# EAGLE board mulemachinePCB_withLEDs (EAGLE 9.6.2)
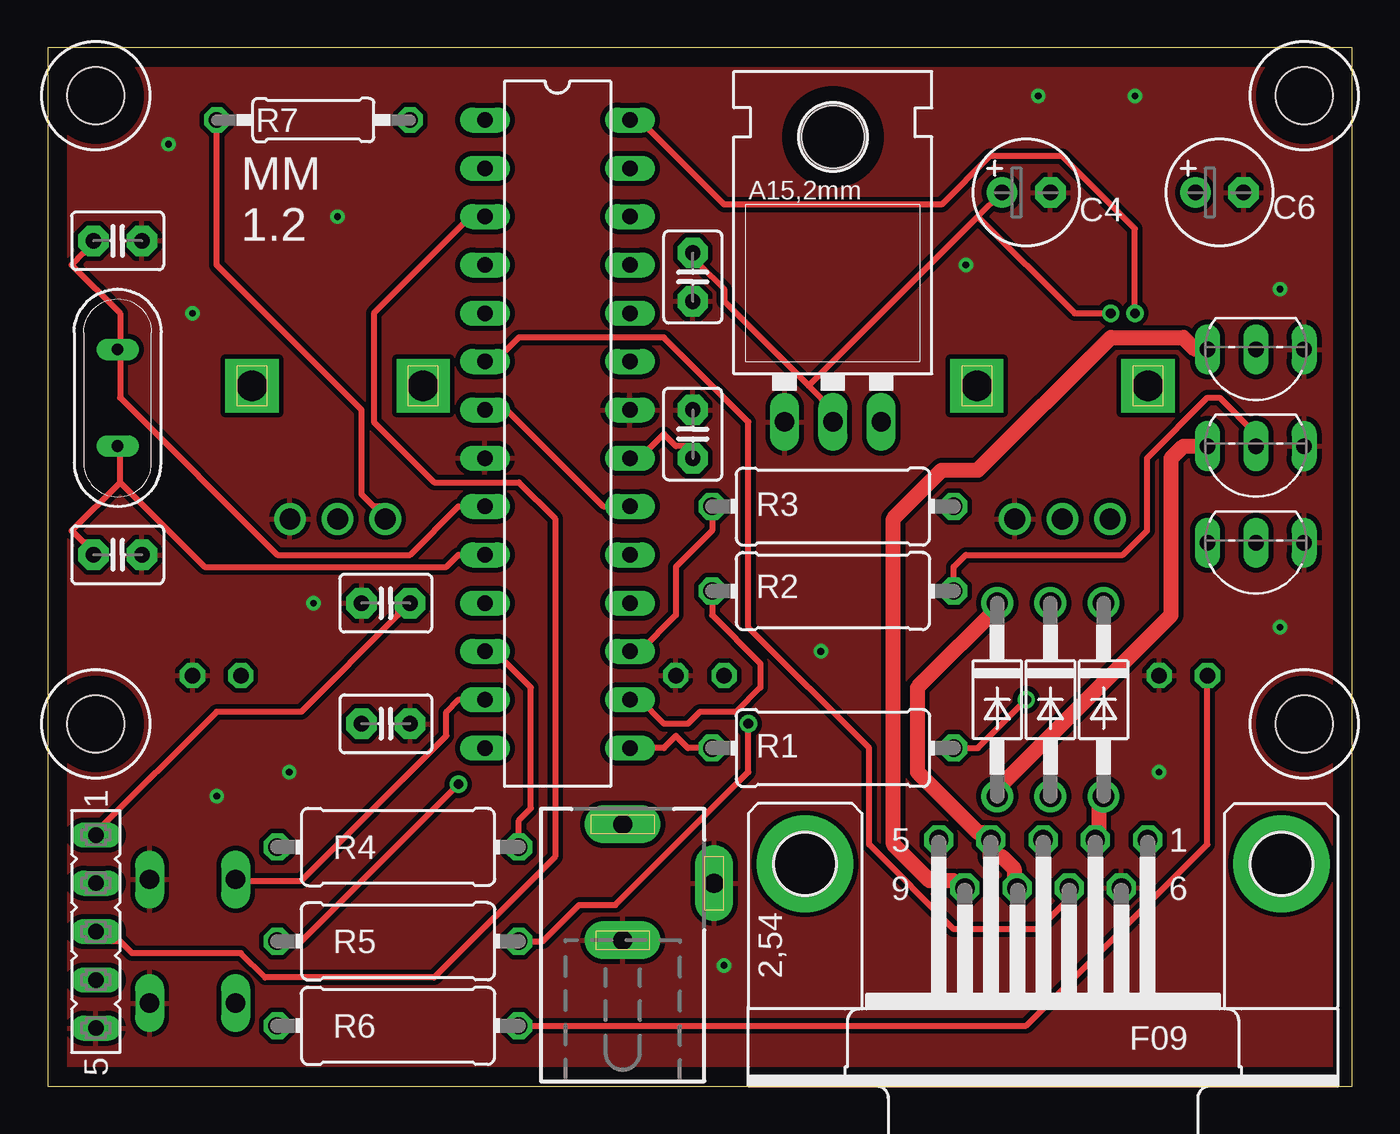
[diagram p0: board, top side]
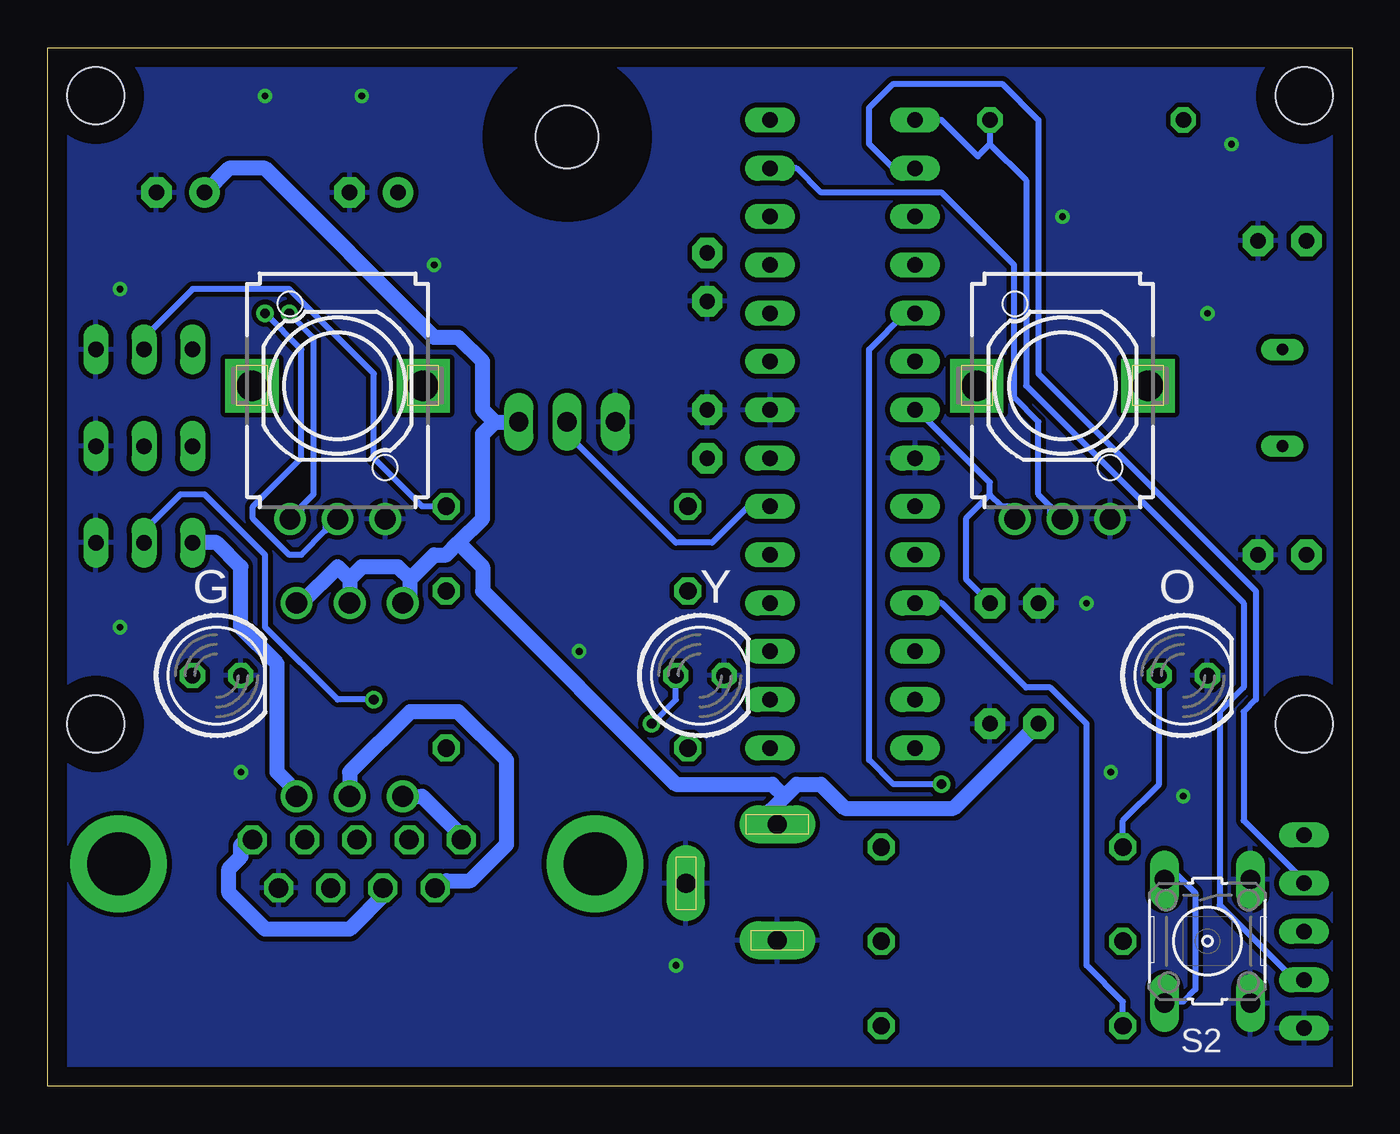
[diagram p1: board, bottom side, seen from below]

Size 68.58 x 54.61 mm. Coordinates in mm from the lower left corner, seen from the top.
Outline: 0,0 68.58,0 68.58,54.61 0,54.61 0,0
Copper layers (1*16): Top 0.035mm / dielectric 1.5mm / Bottom 0.035mm
Design rules "default": minimum track width 6mil, minimum drill 0.35mm, track to track 6mil, track to pad 6mil, pad to pad 6mil, via to via 6mil, smd to smd 6mil, copper to edge 40mil, drill to drill 6mil, minimum pad ring 10mil, minimum via ring 8mil, stop-mask expansion 4mil, vias tented up to drill 0mil, thermal gap 10mil
Net classes: 0 default: width 0.305 mm, drill 0.508 mm, clearance 0.254 mm; 1 Power: width 0.787 mm, drill 0.508 mm, clearance 0.254 mm
Holes 3 mm at 2.54,52.07 2.54,19.05 66.04,19.05 66.04,52.07

## Footprints (pad centres in the part's own frame; a part is rotated, then mirrored left to right if it is on the bottom)
C2.5-3 = drill 0.813 pad 1.6 octagon: 1 -1.27,0; 2 1.27,0
E2,5-6 = drill 0.813 pad 1.6: + -1.27,0 | drill 0.813 pad 1.6 octagon: - 1.27,0
DO41-10 = drill 1.118: A 5.08,0; C -5.08,0
TO220L1 = drill 1.016 long: 1 -2.54,-3.81; 2 0,-3.81; 3 2.54,-3.81 | hole 3.302: 0,11.176
DIL28-3 = drill 0.813 long: 1 -16.51,-3.81; 2 -13.97,-3.81; 3 -11.43,-3.81; 4 -8.89,-3.81; 5 -6.35,-3.81; 6 -3.81,-3.81; 7 -1.27,-3.81; 8 1.27,-3.81; 9 3.81,-3.81; 10 6.35,-3.81; 11 8.89,-3.81; 12 11.43,-3.81; 13 13.97,-3.81; 14 16.51,-3.81; 15 16.51,3.81; 16 13.97,3.81; 17 11.43,3.81; 18 8.89,3.81; 19 6.35,3.81; 20 3.81,3.81; 21 1.27,3.81; 22 -1.27,3.81; 23 -3.81,3.81; 24 -6.35,3.81; 25 -8.89,3.81; 26 -11.43,3.81; 27 -13.97,3.81; 28 -16.51,3.81
DCJ0202 = drill 1 pad 2 long: 1 0,3.1; 2 4.8,0; 3 0,-3
LED5MM = drill 0.813 octagon: A -1.27,0; K 1.27,0
QS = drill 0.61 long: 1 -2.54,0; 2 2.54,0
0411/12 = drill 0.914 octagon: 1 -6.35,0; 2 6.35,0
0207/10 = drill 0.813 octagon: 1 -5.08,0; 2 5.08,0
EVUFXL = drill 1.1 pad 1.676: 1 -2.5,-7; 2 0,-7; 3 2.5,-7 | drill 1.6 pad 2.8 square: M1 4.5,0; M2 -4.5,0
B3F-10XX = drill 1.016 long: 1 -3.251,2.261; 2 3.251,2.261; 3 -3.251,-2.261; 4 3.251,-2.261
FE05-1 = drill 0.813 long: 1 -5.08,0; 2 -2.54,0; 3 0,0; 4 2.54,0; 5 5.08,0
TO92-EBC = drill 0.813 long: B 0,-1.27; C 2.54,-1.27; E -2.54,-1.27
F09HP = drill 1.016 octagon: 1 -5.486,-1.27; 2 -2.743,-1.27; 3 0,-1.27; 4 2.743,-1.27; 5 5.486,-1.27; 6 -4.115,1.27; 7 -1.372,1.27; 8 1.372,1.27; 9 4.115,1.27 | drill 3.302 pad 5.08: G1 -12.522,0; G2 12.522,0

## Placement (x,y rotation side)
C1  0.1uF  [C2.5-3]  33.91,34.29 90 top
C2  22pF  [C2.5-3]  3.68,44.45 0 top
C3  22pF  [C2.5-3]  3.68,27.94 0 top
C4  470uF  [E2,5-6]  51.44,46.99 0 top
C5  0.1uF  [C2.5-3]  33.91,42.55 270 top
C6  470uF  [E2,5-6]  61.59,46.99 0 top
C7  0.1uF  [C2.5-3]  17.78,19.05 0 top
C8  0.1uF  [C2.5-3]  17.78,25.4 0 top
D1  1N4004  [DO41-10]  55.5,20.32 270 top
D2  1N4004  [DO41-10]  49.91,20.32 270 top
D3  1N4004  [DO41-10]  52.7,20.32 270 top
IC1  LD117AV50  [TO220L1]  41.27,38.73 0 top
IC2  MEGA8-P  [DIL28-3]  26.8,34.29 270 top
J1  DCJ0202  [DCJ0202]  30.23,10.67 0 top
LED1  [LED5MM]  8.89,21.59 0 bottom
LED2  [LED5MM]  34.29,21.59 0 bottom
LED3  [LED5MM]  59.69,21.59 0 bottom
Q1  16Mhz  [QS]  3.68,36.2 90 top
R1  150R  [0411/12]  41.27,17.78 0 top
R2  150R  [0411/12]  41.27,26.04 0 top
R3  150R  [0411/12]  41.27,30.48 0 top
R4  200R  [0411/12]  18.41,12.57 180 top
R5  200R  [0411/12]  18.41,7.62 0 top
R6  200R  [0411/12]  18.41,3.17 0 top
R7  10k  [0207/10]  13.97,50.8 0 top
R10  US-EVUF3L  [EVUFXL]  53.34,36.83 0 bottom
R11  US-EVUF3L  [EVUFXL]  15.24,36.83 0 bottom
S2  [B3F-10XX]  7.62,7.62 270 bottom
SV1  [FE05-1]  2.54,8.13 270 top
T1  [TO92-EBC]  63.5,27.3 180 top
T2  [TO92-EBC]  63.5,32.38 180 top
T3  [TO92-EBC]  63.5,37.47 180 top
X2  [F09HP]  52.32,11.68 180 top

## Library data of the parts
C1-C3 C5 C7 C8 = capacitor-wima
C4 C6 = rcl; SPICEPREFIX: C
D1-D3 = diode
IC1 = v-reg
IC2 = atmel; OC_FARNELL: unknown; OC_NEWARK: unknown
J1 = con-jack; OC_FARNELL: unknown; OC_NEWARK: unknown
LED1-LED3 = led
Q1 = special
R1-R7 = rcl; SPICEPREFIX: R
R10 R11 = pot
S2 = switch-omron; MPN: B3F-1000; OC_FARNELL: 176432; OC_NEWARK: 36M3542
SV1 = con-lsta; OC_FARNELL: unknown; OC_NEWARK: unknown
T1-T3 = transistor-neu-to92
X2 = con-subd; OC_FARNELL: unknown; OC_NEWARK: unknown

## Nets
5V: C4.+ C5.1 C8.2 IC1.2 IC2.7 IC2.20 R7.1 R10.1 R11.1 SV1.1
CUPSENSOR: IC2.6 X2.7
GND [Power]: C1.2 C2.2 C3.2 C4.- C5.2 C6.- C7.2 C8.1 IC1.1 IC2.8 IC2.22 J1.2 J1.3 LED1.K LED2.K LED3.K R10.3 R11.3 S2.1 S2.2 SV1.5 T1.E T2.E T3.E X2.6
GREEN: LED3.A R6.2
LED_GREEN_PWM: IC2.11 R6.1
LED_ORANGE_PWM: IC2.12 R4.1
LED_YELLOW_PWM: IC2.5 R5.1
MANUALOVERRIDE: IC2.13 S2.3 S2.4
N$5: R3.2 T3.B
N$6: R2.2 T2.B
N$10: R1.2 T1.B
N$11: C3.1 IC2.10 Q1.1
N$12: C2.1 IC2.9 Q1.2
N$13: C1.1 IC2.21
ORANGE: LED1.A R4.2
PUMP_GB_PWM: IC2.16 R2.1
PUMP_GB_VCC [Power]: D2.A T2.C X2.5
PUMP_LIME_PWM: IC2.17 R3.1
PUMP_LIME_VCC [Power]: D3.A T3.C X2.9
PUMP_VODKA_PWM: IC2.15 R1.1
PUMP_VODKA_VCC [Power]: D1.A T1.C X2.2
RESET: IC2.1 R7.2 SV1.4
RX: IC2.2 SV1.2
SOURRPOT: IC2.28 R10.2
STRPOT: IC2.27 R11.2
TX: IC2.3 SV1.3
VCC [Power]: C6.+ C7.1 D1.C D2.C D3.C IC1.3 J1.1 X2.1 X2.4 X2.8
YELLOW: LED2.A R5.2

## Tracks (layer width: path | path; a pad name or v marks a point on that pad's centre or on a via)
5V  (via drill 0.51)
  Top 0.305: IC1.2 41.27,35.56 40.01,36.83 | 40.01,36.83 35.56,41.27 35.56,41.91 34.29,43.18 33.66,43.18 33.66,43.81 C5.1 | 40.01,36.83 48.9,45.72 | 48.9,45.72 C4.+ | v55.88,40.64 53.98,40.64 48.9,45.72 | C8.2 18.41,25.4 18.41,24.77 13.34,19.68 8.89,19.68 2.54,13.34 SV1.1 | R7.1 8.89,43.18 16.51,35.56 16.51,31.11 17.14,30.48 17.78,30.48 17.78,29.84 R11.1 | IC2.20 29.21,30.48 24.13,35.56 IC2.7
  Bottom 0.305: v55.88,40.64 54.61,39.37 54.61,31.11 55.24,30.48 55.24,29.84 R10.1 | 19.05,31.11 19.05,31.75 22.86,35.56 IC2.7 | 19.05,31.11 18.41,30.48 17.78,30.48 17.14,29.84 R11.1 | C8.2 20.32,26.67 20.32,29.84 19.05,31.11 | IC1.2 41.27,34.29 35.56,28.57 33.66,28.57 31.75,30.48 IC2.20
CUPSENSOR
  Top 0.305: IC2.6 23.5,38.1 24.77,39.37 32.38,39.37 36.83,34.92 36.83,24.13 43.18,17.78 43.18,12.7 47.62,8.26 52.07,8.26 53.98,10.16 X2.7
GND  (via drill 0.35)
  other vias: 6.35,49.53 7.62,40.64 15.24,45.72 13.97,25.4 12.7,16.51 8.89,15.24 35.56,6.35 40.64,22.86 64.77,24.13 58.42,16.51 57.15,52.07 52.07,52.07 48.26,43.18 64.77,41.91
  pour Bottom (isolate 0.254): -1.27,58.42 -1.27,-1.27 69.85,-1.27 69.85,58.42
  pour Top (isolate 0.254): -1.27,55.88 -1.27,-1.27 69.85,-1.27 69.85,55.88
GREEN
  Top 0.305: LED3.A 60.96,12.7 51.44,3.17 R6.2
LED_GREEN_PWM
  Bottom 0.305: IC2.11 21.59,25.4 17.14,20.95 15.88,20.95 13.97,19.05 13.97,6.35 12.06,4.45 R6.1
LED_ORANGE_PWM
  Top 0.305: R4.1 24.77,13.97 25.4,14.61 25.4,20.95 23.5,22.86 IC2.12
LED_YELLOW_PWM  (via drill 0.51)
  Top 0.305: v21.59,15.88 13.34,7.62 R5.1
  Bottom 0.305: v21.59,15.88 24.13,15.88 25.4,17.14 25.4,38.73 23.5,40.64 IC2.5
MANUALOVERRIDE
  Top 0.305: IC2.13 21.59,20.32 20.95,19.68 20.95,18.41 13.34,10.79 10.16,10.79 S2.3
  Bottom 0.305: S2.4 9.53,4.45 8.89,4.45 8.26,5.08 8.26,10.16 9.53,11.43 S2.3
N$5
  Bottom 0.305: T3.B 63.5,39.37 60.96,41.91 55.88,41.91 51.44,37.47 51.44,33.02 48.9,30.48 R3.2
N$6
  Top 0.305: T2.B 63.5,34.29 61.59,36.2 60.96,36.2 57.78,33.02 57.78,29.21 56.52,27.94 48.26,27.94 47.62,27.3 R2.2
N$10  (via drill 0.51)
  Top 0.305: v51.44,20.32 48.9,17.78 R1.2
  Bottom 0.305: T1.B 63.5,29.21 61.59,31.11 60.33,31.11 57.15,27.94 57.15,24.13 53.34,20.32 v51.44,20.32
N$11
  Top 0.305: 3.81,31.75 3.81,33.66 Q1.1 | 3.81,31.75 1.27,29.21 1.91,28.57 2.54,28.57 2.54,27.94 C3.1 | IC2.10 21.59,27.94 20.95,27.3 8.26,27.3 3.81,31.75
N$12
  Top 0.305: 3.81,38.73 3.81,40.64 1.27,43.18 1.91,43.81 2.54,43.81 2.54,44.45 C2.1 | IC2.9 21.59,30.48 19.05,27.94 12.06,27.94 3.81,36.2 3.81,38.73 | 3.81,38.73 Q1.2
N$13
  Top 0.305: IC2.21 31.11,33.02 32.38,34.29 33.02,33.66 33.66,33.66 34.29,33.02 C1.1
ORANGE
  Bottom 0.305: LED1.A 10.16,15.88 12.06,13.97 R4.2
PUMP_GB_PWM
  Top 0.305: R2.1 34.92,24.77 37.47,22.23 37.47,20.95 36.2,19.68 34.29,19.68 33.66,19.05 32.38,19.05 31.11,20.32 IC2.16
PUMP_GB_VCC
  Top 0.787: T2.C 59.69,33.66 59.05,33.02 59.05,24.77 49.53,15.24 D2.A
  Bottom 0.787: D2.A 48.9,15.24 46.99,13.34 X2.5
PUMP_LIME_PWM
  Top 0.305: R3.1 34.92,29.21 33.02,27.3 33.02,24.77 31.11,22.86 IC2.17
PUMP_LIME_VCC
  Top 0.787: T3.C 60.33,38.73 59.69,39.37 55.88,39.37 48.9,32.38 46.99,32.38 44.45,29.84 44.45,12.7 46.35,10.79 47.62,10.79 X2.9
  Bottom 0.787: D3.A 52.7,16.51 49.53,19.68 46.99,19.68 44.45,17.14 44.45,12.7 46.35,10.79 47.62,10.79 X2.9
PUMP_VODKA_PWM
  Top 0.305: IC2.15 32.38,17.78 33.02,18.41 33.66,17.78 R1.1
PUMP_VODKA_VCC
  Top 0.787: X2.2 55.24,13.34 55.24,15.24 D1.A
  Bottom 0.787: T1.C 59.69,28.57 58.42,27.3 58.42,24.13 56.52,22.23 56.52,16.51 55.24,15.24 D1.A
RESET
  Bottom 0.305: 19.05,49.53 17.14,47.62 17.14,36.83 5.71,25.4 5.71,20.95 6.99,19.68 6.99,9.53 3.17,5.71 2.54,5.71 SV1.4 | R7.2 19.05,49.53 | IC2.1 21.59,50.8 19.68,48.9 19.05,49.53
RX
  Bottom 0.305: IC2.2 24.13,48.26 25.4,49.53 25.4,51.44 24.13,52.7 18.41,52.7 16.51,50.8 16.51,37.47 5.08,26.04 5.08,20.32 5.71,19.68 5.71,13.97 2.54,10.79 SV1.2
SOURRPOT  (via drill 0.51)
  Top 0.305: v57.15,40.64 57.15,45.09 53.34,48.9 49.53,48.9 46.99,46.35 35.56,46.35 31.11,50.8 IC2.28
  Bottom 0.305: v57.15,40.64 55.24,38.73 55.24,33.02 57.78,30.48 57.78,29.84 55.88,27.94 55.24,27.94 53.98,29.21 53.98,29.84 53.34,29.84 R10.2
STRPOT
  Bottom 0.305: IC2.27 29.21,48.26 27.94,46.99 21.59,46.99 17.78,43.18 17.78,36.2 16.51,34.92 16.51,31.11 15.88,30.48 15.88,29.84 15.24,29.21 R11.2
TX
  Top 0.305: IC2.3 22.23,45.72 17.14,40.64 17.14,34.92 20.32,31.75 24.77,31.75 26.67,29.84 26.67,12.06 20.32,5.71 11.43,5.71 10.16,6.99 4.45,6.99 3.81,7.62 2.54,7.62 SV1.3
VCC
  Top 0.787: X2.8 50.8,10.79 50.8,11.43 50.16,12.06 49.53,12.06 49.53,12.7 X2.4 49.53,13.34 48.9,13.34 45.72,16.51 45.72,20.95 50.16,25.4 D2.C
  Bottom 0.787: C7.1 20.95,14.61 26.67,14.61 27.94,15.88 29.21,15.88 29.84,15.24 | 29.84,15.24 31.11,13.97 30.48,13.34 J1.1 | X2.1 58.42,12.7 58.42,12.06 59.05,11.43 59.05,10.16 57.15,8.26 52.7,8.26 50.8,10.16 X2.8 | 45.09,34.92 IC1.3 | 45.09,34.92 45.72,34.29 45.72,29.84 46.99,28.57 | 46.99,28.57 47.62,27.94 48.26,27.94 49.53,26.67 | 49.53,26.67 49.53,25.4 D2.C | C6.+ 59.05,48.26 57.15,48.26 48.26,39.37 46.99,39.37 45.72,38.1 45.72,35.56 45.09,34.92 | 52.7,26.67 D3.C | 52.7,26.67 52.07,27.3 50.16,27.3 49.53,26.67 | 52.7,26.67 53.34,27.3 55.24,25.4 D1.C | 29.84,15.24 30.48,15.88 35.56,15.88 45.72,26.04 45.72,27.3 46.99,28.57
YELLOW  (via drill 0.51)
  Top 0.305: v36.83,19.05 36.83,16.51 29.84,9.53 27.94,9.53 26.04,7.62 R5.2
  Bottom 0.305: LED2.A 35.56,20.32 v36.83,19.05

## Text on the board
tPlace: MM / 1.2
bPlace: O | Y | G